# EAGLE board SolderingStation (EAGLE 6.1)
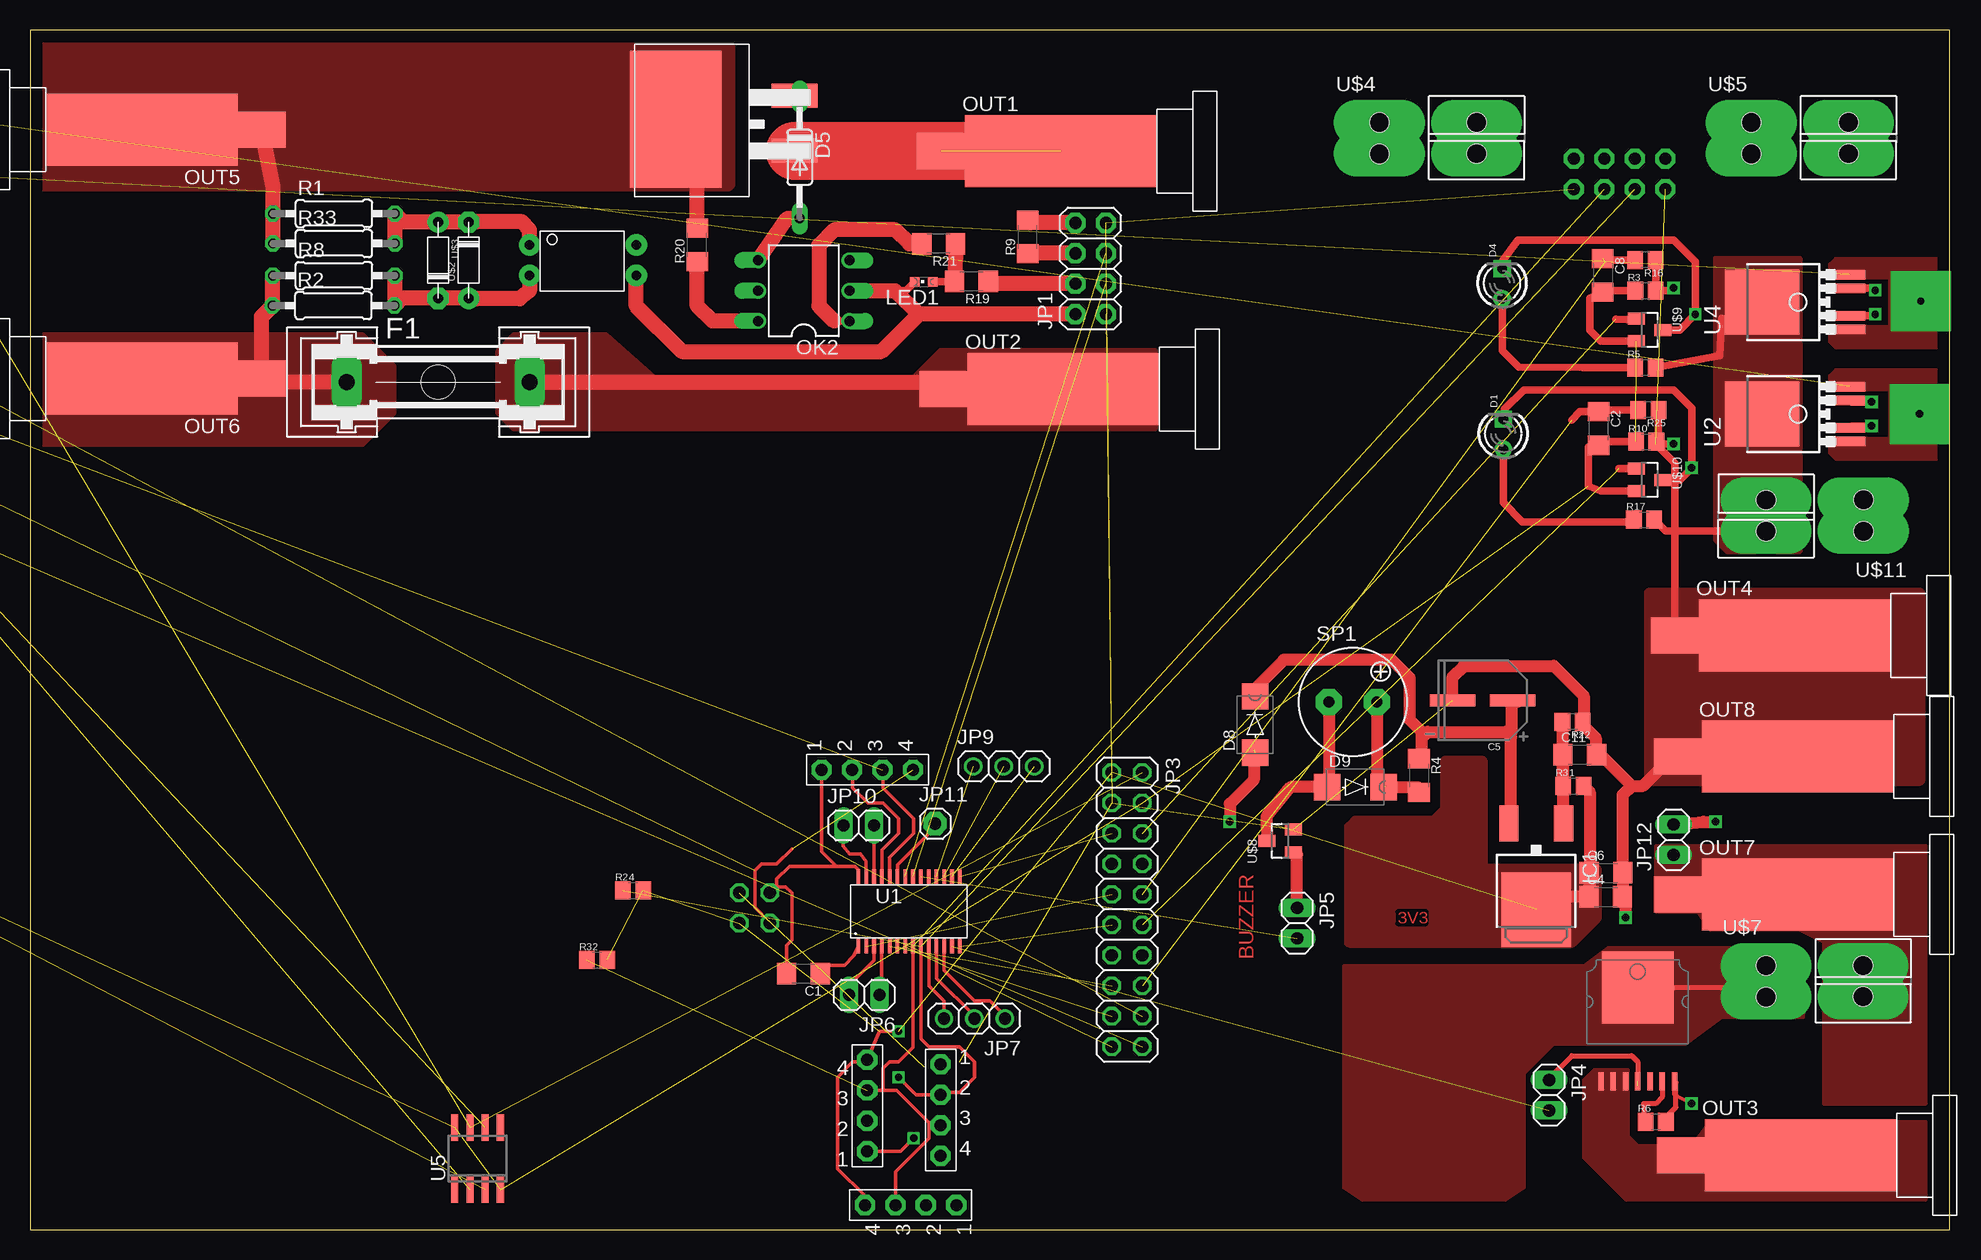
[diagram p0: board, top side]
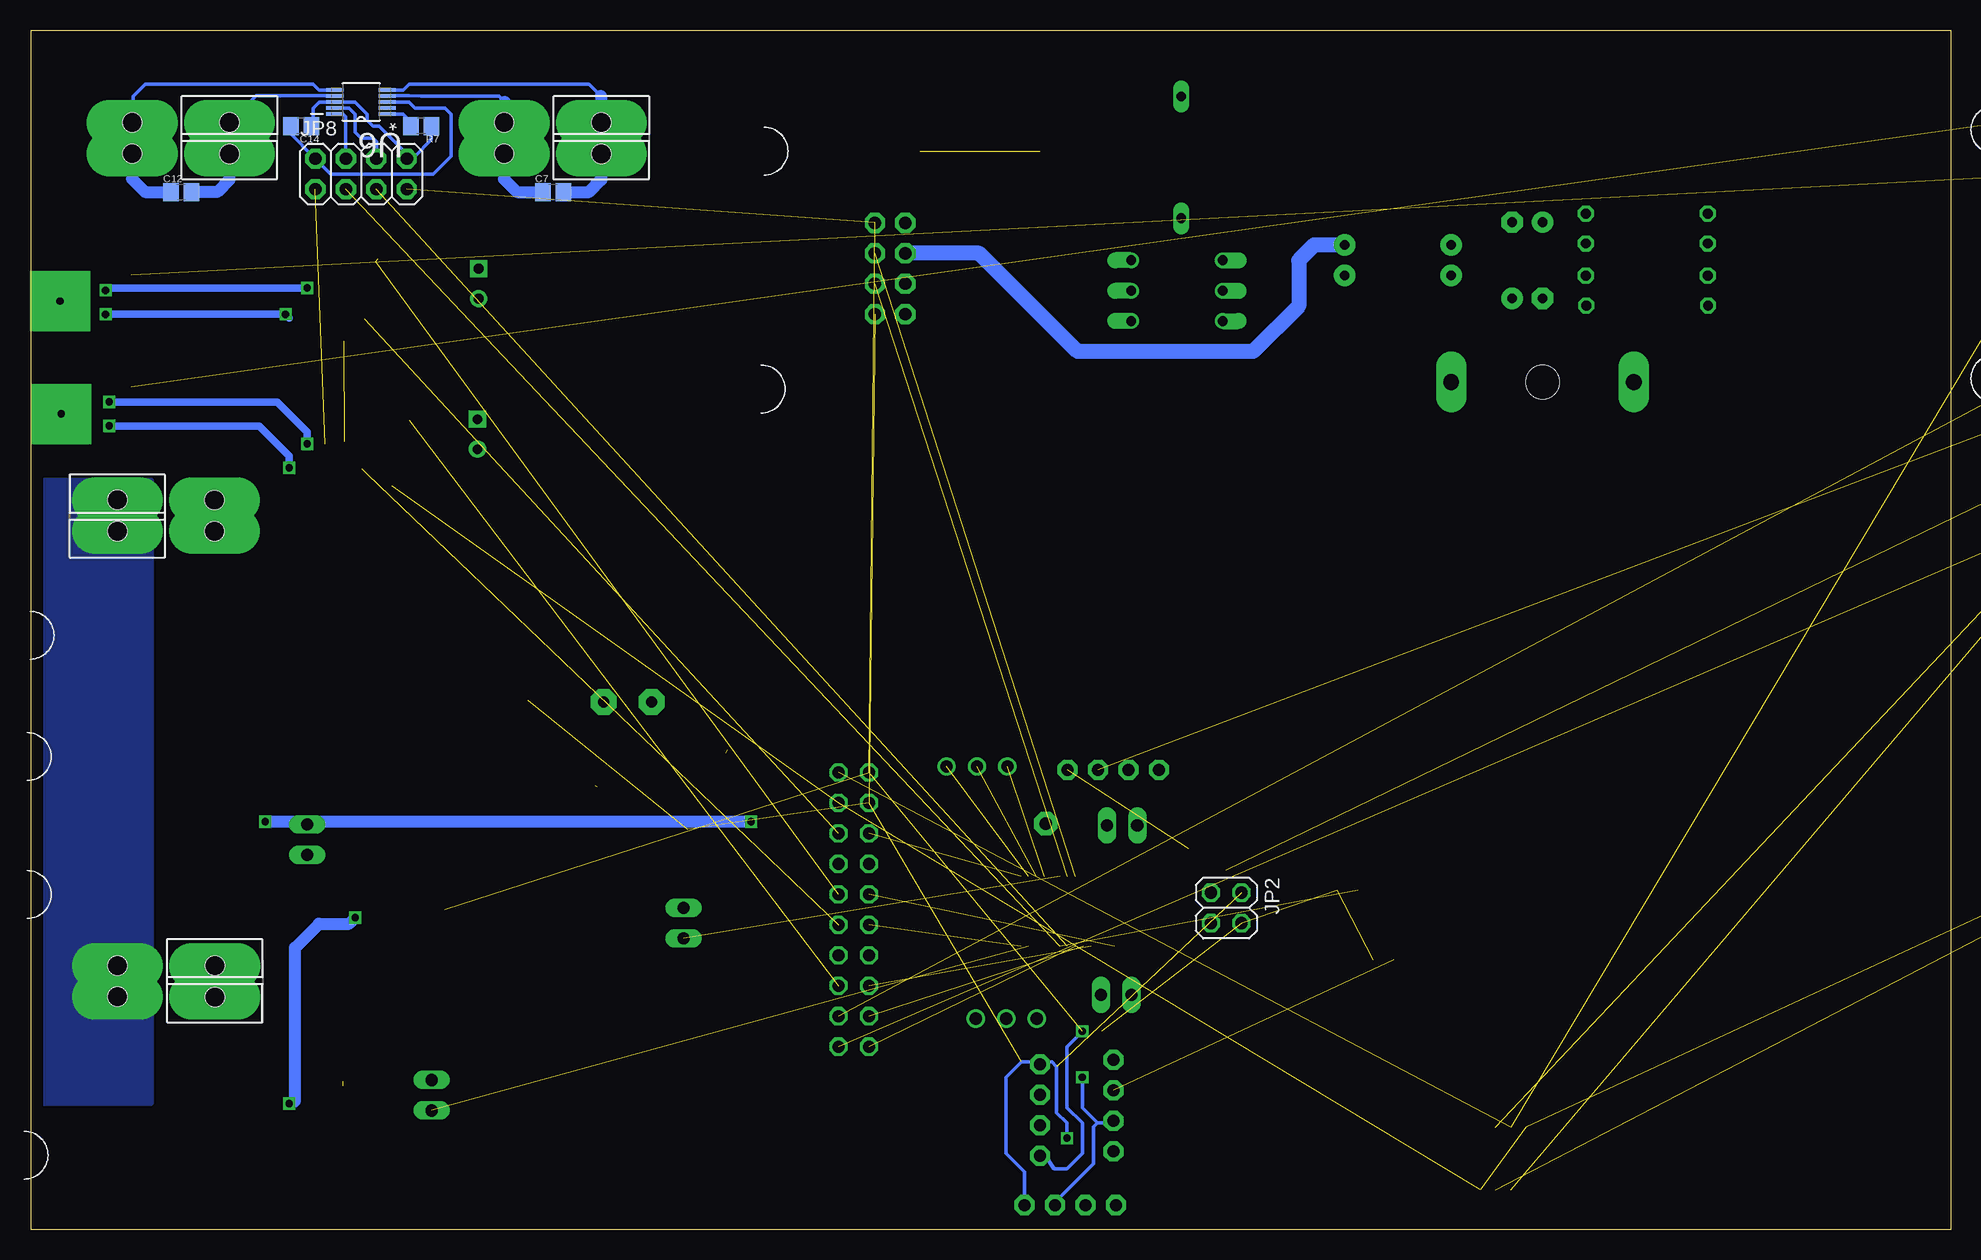
[diagram p1: board, bottom side, seen from below]

Size 160 x 100 mm. Coordinates in mm from the lower left corner, seen from the top.
Outline: 0,0 160,0 160,100 0,100 0,0
Copper layers (1*16): Top 0.035mm / dielectric 1.5mm / Bottom 0.035mm
Design rules: minimum track width 10mil, minimum drill 24mil, track to track 8mil, track to pad 8mil, pad to pad 8mil, via to via 8mil, smd to smd 8mil, copper to edge 40mil, drill to drill 8mil, minimum pad ring 10mil, minimum via ring 8mil, stop-mask expansion 4mil, vias tented up to drill 0mil, thermal gap 10mil

## Footprints (pad centres in the part's own frame; a part is rotated, then mirrored left to right if it is on the bottom)
1206 = smd 1.6 x 1.8: 1 -1.4,0; 2 1.4,0
0805 = smd 1.3 x 1.5: 1 -0.85,0; 2 0.85,0
C_EL_6.3X5.4 = smd 3.81 x 1: + -2.5,0; - 2.5,0
OCTAPAK = smd 0.45 x 1.5: CS 1.03,-7.14; FR_DIAG 2.05,-7.14; GND 3.07,-7.14; INPUT 0.01,-7.14; OUTPUT1 -2.03,-7.14; OUTPUT2 -3.05,-7.14; OUTPUT3 -1.01,-7.14 | smd 6 x 6: VCC 0,0.69
LED_3MM = drill 0.813 pad 1.422: A -1.3,0 | drill 0.813 pad 1.422 square: K 1.2,0
SOT23 = smd 1 x 1.4: 1 -0.95,-1.1; 2 0.95,-1.1; 3 0,1.1
DO35-10 = drill 0.813 long: A 5.08,0; C -5.08,0
S1D = smd 2.2 x 2.2: A -2.35,0; C 2.35,0
GSH15 = drill 1.321 pad 2.54 long: 1 -7.62,0; 2 7.62,0 | hole 2.794: 0,0
DPACK = smd 1.6 x 3: 1 -2.28,-4.8; 3 2.28,-4.8 | smd 5.8 x 6.2: 4 0,2.38
JP4 = drill 1 pad 1.676 octagon: 1 0,-3.81; 2 0,-1.27; 3 0,1.27; 4 0,3.81
2X04 = drill 1.016 pad 1.676 octagon: 1 -3.81,-1.27; 2 -3.81,1.27; 3 -1.27,-1.27; 4 -1.27,1.27; 5 1.27,-1.27; 6 1.27,1.27; 7 3.81,-1.27; 8 3.81,1.27
2X02 = drill 1.016 octagon: 1 -1.27,-1.27; 2 -1.27,1.27; 3 1.27,-1.27; 4 1.27,1.27
2X10 = drill 1.016 octagon: 1 -11.43,-1.27; 2 -11.43,1.27; 3 -8.89,-1.27; 4 -8.89,1.27; 5 -6.35,-1.27; 6 -6.35,1.27; 7 -3.81,-1.27; 8 -3.81,1.27; 9 -1.27,-1.27; 10 -1.27,1.27; 11 1.27,-1.27; 12 1.27,1.27; 13 3.81,-1.27; 14 3.81,1.27; 15 6.35,-1.27; 16 6.35,1.27; 17 8.89,-1.27; 18 8.89,1.27; 19 11.43,-1.27; 20 11.43,1.27
1X02 = drill 1.016 long: 1 -1.27,0; 2 1.27,0
1X03 = drill 1.016: 1 -2.54,0; 2 0,0; 3 2.54,0
1X01 = drill 1.016 pad 1.93 octagon: 1 0,0
CHIPLED_0603 = smd 0.8 x 0.8: A 0,-0.75; C 0,0.75
DIL06 = drill 0.813 offset: 1 -2.54,-3.81; 2 0,-3.81; 3 2.54,-3.81; 4 2.54,3.81; 5 0,3.81; 6 -2.54,3.81
BANANA = smd 16 x 6: P$1 0.84,-0.08 | smd 4 x 3: P$2 -9.16,-0.08
RTH025W = drill 0.813 octagon: 1 -5.08,0; 2 5.08,0
KSTG951AP = drill 0.914 pad 2.159 octagon: + 2,0; - -2,0
PW28 = smd 0.3 x 1.2: 1 -4.229,-2.908; 2 -3.579,-2.908; 3 -2.929,-2.908; 4 -2.279,-2.908; 5 -1.629,-2.908; 6 -0.979,-2.908; 7 -0.329,-2.908; 8 0.321,-2.908; 9 0.971,-2.908; 10 1.621,-2.908; 11 2.271,-2.908; 12 2.921,-2.908; 13 3.571,-2.908; 14 4.221,-2.908; 15 4.221,2.892; 16 3.571,2.892; 17 2.921,2.892; 18 2.271,2.892; 19 1.621,2.892; 20 0.971,2.892; 21 0.321,2.892; 22 -0.329,2.892; 23 -0.979,2.892; 24 -1.629,2.892; 25 -2.279,2.892; 26 -2.929,2.892; 27 -3.579,2.892; 28 -4.229,2.892
TO252-51 = smd 0.8 x 2.6: 1 -2.28,-4.8; 2 -1.14,-4.8; 4 1.14,-4.8; 5 2.28,-4.8 | smd 5.4 x 6.2: TAB 0,2.5
SO08 = smd 0.6 x 2.2: 1 -1.905,-2.6; 2 -0.635,-2.6; 3 0.635,-2.6; 4 1.905,-2.6; 5 1.905,2.6; 6 0.635,2.6; 7 -0.635,2.6; 8 -1.905,2.6
SOP50P490X110-10N = smd 1.422 x 0.279: 1 -2.184,0.991; 2 -2.184,0.508; 3 -2.184,0; 4 -2.184,-0.508; 5 -2.184,-0.991; 6 2.184,-0.991; 7 2.184,-0.508; 8 2.184,0; 9 2.184,0.508; 10 2.184,0.991
DIP_4PIN = drill 0.8 pad 1.778: P$1 1.27,5.08; P$2 -1.27,5.08; P$3 -1.27,-3.81; P$4 1.27,-3.81
ZENER = drill 0.813 pad 1.778: A -3.175,0 | drill 0.813 pad 1.778 octagon: K 3.175,0
SOCLU_THERMOCOUPLE = drill 1.6 pad 3.81 long: 1A -4.019,1.281; 1B 4.081,1.281; 2A -4.019,-1.319; 2B 4.081,-1.321 | hole 1.6: -4.02,1.28; -4.02,-1.33; 4.08,-1.31; 4.08,1.28
TO-263 = smd 2 x 3.81: G 4.6,0; T1 0,0 | smd 11.43 x 7.62: T2 2.635,9.905

## Placement (x,y rotation side)
C1  10uF  [1206]  64.47,21.32 180 top
C2  10uF  [1206]  130.74,66.78 270 top
C3  1nF  [0805]  -72.39,83.82 0 top  (outside the outline)
C4  100nF  [1206]  131.34,27.74 0 top
C5  22uF  [C_EL_6.3X5.4]  121.08,44.12 180 top
C6  10uF  [1206]  131.36,29.74 0 top
C7  1nF  [0805]  116.5,86.5 0 bottom
C8  10uF  [1206]  131.09,79.54 270 top
C9  1nF  [0805]  -76.2,83.82 0 top  (outside the outline)
C10  100nF  [0805]  -80.01,83.82 0 top  (outside the outline)
C11  100nF  [1206]  129.18,39.59 0 top
C12  1nF  [0805]  147.5,86.5 0 bottom
C13  100nF  [0805]  -83.82,83.82 0 top  (outside the outline)
C14  10uF  [0805]  137.5,92 180 bottom
CLH1  VN7004  [OCTAPAK]  134,19.5 0 top
D1  [LED_3MM]  122.81,66.35 90 top
D2  [SOT23]  -80.26,63.26 180 top  (outside the outline)
D3  [SOT23]  -75.82,63.24 0 top  (outside the outline)
D4  [LED_3MM]  122.71,78.9 90 top
D5  [DO35-10]  64.15,89.38 270 top
D6  [SOT23]  -71.1,63.26 180 top  (outside the outline)
D7  [SOT23]  -66.98,63.24 0 top  (outside the outline)
D8  S1D  [S1D]  102.11,42.09 90 top
D9  S1D  [S1D]  110.47,36.89 0 top
F1  2.5A  [GSH15]  34.02,70.65 0 top
IC1  LM317  [DPACK]  125.55,29.05 180 top
J1  [JP4]  75.91,9.96 180 top
J2  [JP4]  69.79,10.32 0 top
J3  [JP4]  73.4,2.04 90 top
J4  [JP4]  69.8,38.32 270 top
JP1  [2X04]  88.41,80.11 90 top
JP2  [2X02]  60.39,26.81 270 bottom
JP3  [2X10]  91.44,26.67 270 top
JP4  [1X02]  126.62,11.19 270 top
JP5  [1X02]  105.62,25.54 270 top
JP6  [1X02]  69.55,19.56 180 top
JP7  [1X03]  78.72,17.59 180 top
JP8  [2X04]  132.5,88 0 bottom
JP9  [1X03]  81.17,38.61 0 top
JP10  [1X02]  69.07,33.69 0 top
JP11  [1X01]  75.44,33.83 0 top
JP12  [1X02]  137,32.5 90 top
LED1  [CHIPLED_0603]  74.5,79 90 top
OK2  IL410  [DIL06]  64.5,78.27 90 top
OUT1  BANANA  [BANANA]  85.09,89.99 0 top
OUT2  BANANA  [BANANA]  85.32,70.15 0 top
OUT3  BANANA  [BANANA]  146.76,6.28 0 top
OUT4  BANANA  [BANANA]  146.26,49.62 0 top
OUT5  BANANA  [BANANA]  10.15,91.61 180 top
OUT6  BANANA  [BANANA]  10.15,70.86 180 top
OUT7  BANANA  [BANANA]  146.5,28 0 top
OUT8  BANANA  [BANANA]  146.5,39.5 0 top
R1  [RTH025W]  25.33,84.69 0 top
R2  [RTH025W]  25.3,77.03 0 top
R3  10K  [0805]  134.66,78.27 0 top
R4  287R  [1206]  115.77,37.85 270 top
R5  4K7  [0805]  134.64,71.87 0 top
R6  4K7  [0805]  135.5,9 0 top
R7  4K7  [0805]  127.5,92 180 bottom
R8  [RTH025W]  25.33,79.52 0 top
R9  4K7  [1206]  83.17,82.75 90 top
R10  10K  [0805]  134.71,65.67 0 top
R11  240K  [0805]  -38.1,90.17 0 top  (outside the outline)
R12  470R  [0805]  -41.91,90.17 0 top  (outside the outline)
R13  1K  [0805]  -45.72,90.17 0 top  (outside the outline)
R14  240K  [0805]  -49.53,90.17 0 top  (outside the outline)
R15  4K7  [0805]  -53.84,85.17 0 top  (outside the outline)
R16  47K  [0805]  134.65,80.83 180 top
R17  4K7  [0805]  134.54,59.17 0 top
R18  4K7  [0805]  -64.77,90.17 0 top  (outside the outline)
R19  295  [1206]  78.47,79.03 180 top
R20  1K  [1206]  55.61,82.08 90 top
R21  124  [1206]  75.74,82.18 180 top
R22  390R  [0805]  128.58,42.33 180 top
R24  4K7  [0805]  50.26,28.28 0 top
R25  47K  [0805]  134.89,68.33 180 top
R26  240K  [0805]  -76.2,90.17 0 top  (outside the outline)
R27  470R  [0805]  -80.01,90.17 0 top  (outside the outline)
R28  1K  [0805]  -83.82,90.17 0 top  (outside the outline)
R29  240K  [0805]  -15.24,93.98 0 top  (outside the outline)
R30  4K7  [0805]  -19.05,93.98 0 top  (outside the outline)
R31  240R  [0805]  128.64,36.98 0 top
R32  4K7  [0805]  47.26,22.47 0 top
R33  [RTH025W]  25.33,82.2 0 top
SP1  KSTG951AP  [KSTG951AP]  110.28,43.98 0 top
U1  MSP340G2443  [PW28]  73.28,26.53 0 top
U2  UPD166010  [TO252-51]  146.88,67.98 90 top
U3  MCP6V08  [SO08]  -59.3,62.91 0 top  (outside the outline)
U4  UPD166010  [TO252-51]  146.88,77.32 90 top
U5  MCP6V08  [SO08]  37.31,5.91 0 top
U6  ADS1115IDGST  [SOP50P490X110-10N]  132.5,94 180 bottom
U$1  FOD814SD  [DIP_4PIN]  46.72,80.81 90 top
U$2  5V  [ZENER]  36.56,80.81 90 top
U$3  5V  [ZENER]  34.02,80.81 270 top
U$4  Siguranta  [SOCLU_THERMOCOUPLE]  116.5,91 0 top
U$5  Siguranta  [SOCLU_THERMOCOUPLE]  147.5,91 0 top
U$6  Q8025NH6RP  [TO-263]  63.74,89.92 90 top
U$7  Siguranta  [SOCLU_THERMOCOUPLE]  148.72,20.71 0 top
U$8  NUD3160  [SOT23]  104.2,32.4 90 top
U$9  NUD3160  [SOT23]  135,75 270 top
U$10  NUD3160  [SOT23]  135,62.5 270 top
U$11  Siguranta  [SOCLU_THERMOCOUPLE]  148.8,59.5 180 top

## Library data of the parts
C1-C3 C7-C10 C12 C13 R3-R7 R10-R18 R22 R24-R32 = adi_v1.2
C4 C6 C11 C14 = ATE
C5 D1 D4 D9 J1-J4 U$8-U$10 = adi_v1.4
CLH1 U$1 U$4-U$7 U$11 = Serghei IR station
D2 D3 D6-D8 U1-U5 = adi_v1.3
D5 = diode
F1 = fuse; MPN: 64900001039; OC_FARNELL: 1271673; OC_NEWARK: 02P0318
IC1 = v-reg
JP1 JP7-JP9 = adafruit1
JP2 JP4-JP6 JP10 JP12 = pinhead
JP3 OUT1-OUT8 R9 R19-R21 = H_bridge_library
JP11 = adafruit
LED1 = led
OK2 = optocoupler; MF: VISHAY/TELEFUNKEN; MPN: IL410; OC_FARNELL: 1045434; OC_NEWARK: 58K1715
R1 R2 R8 R33 = dp_devices
SP1 = adi_v1.4; OC_FARNELL: http://ro.farnell.com/kingstate/kstg951ap/buzzer-magnetic-pin-85db-5v/dp/2215078?Ntt=KSTG951AP; OC_NEWARK: unknown
U6 = Texas Instruments_By_element14_Batch_1; MPN: ADS1115IDGST; OC_FARNELL: 1762981; OC_NEWARK: 25R1241; PACKAGE: MSOP-10; SUPPLIER: Texas Instruments
U$2 U$3 = adi_v1.6

## Nets
24V_DRIVER_UC: JP4.2 U1.13
220V_DRIVER_UC: JP1.3 U1.21
+3V3: C4.1 C6.1 IC1.4 J1.4 J2.4 J3.4 JP1.7 JP2.4 JP3.1 JP8.7 R24.2 R31.2 R32.2
+3V3_220V: JP1.8 R9.2
+3V3_CONTROLLER: C1.1 U1.1
+3V3_ST_LIPIT: C10.1 C13.1 JP3.2 R14.2 R29.2 U3.7 U5.7
+3V3_UC: J4.4 JP2.3 R18.2
+12V: C5.+ D8.C IC1.3 R4.1
+15V: JP12.1 OUT7.P$1 OUT7.P$2 U$7.1B U$7.2B U$11.1A U$11.2A
CRT_SENSE1: C8.1 JP3.10 R16.2
CRT_SENSE1_UC: JP3.9 U1.2
CRT_SENSE2: C2.1 JP3.16 R25.2
CRT_SENSE2_UC: JP3.15 U1.5
ENCODER1_1: JP9.3 U1.16
ENCODER1_2: JP9.2 U1.17
ENCODER1_3: JP9.1 U1.18
ENCODER2_1: JP7.3 U1.10
ENCODER2_2: JP7.2 U1.11
ENCODER2_3: JP7.1 U1.12
ENCODER3_1: JP10.1 U1.27
ENCODER3_2: JP10.2 U1.26
ENCODER3_3: JP11.1 U1.23
FET_PWM1: JP3.6 U$9.1
FET_PWM1_UC: JP3.5 U1.15
FET_PWM2: JP3.12 U$10.1
FET_PWM2_UC: JP3.11 U1.14
GND: C4.2 C5.- C6.2 C11.2 CLH1.GND J1.1 J2.1 J3.1 JP1.1 JP2.2 JP3.3 JP8.1 OUT4.P$1 OUT4.P$2 OUT8.P$1 OUT8.P$2 R6.2 R22.1 U$8.2
GND_220V: JP1.2 LED1.C OK2.2 U$1.P$3
GND_ST_LIPIT: C2.2 C3.2 C8.2 C9.2 C10.2 C13.2 D2.3 D3.1 D6.3 D7.1 JP3.4 R3.1 R10.1 R13.1 R28.1 U3.4 U3.8 U5.4 U5.8 U$9.2 U$10.2
GND_UC: C1.2 J4.1 JP2.1 U1.28
N$2: D1.K U2.2 U$10.3
N$3: D4.A R5.1
N$4: D1.A R17.1
N$5: D9.A SP1.- U$8.3
N$7: D4.K U4.2 U$9.3
N$8: R10.2 R25.1 U2.4
N$9: R26.1 R27.2 U3.6
N$10: D6.1 D7.3 R30.1 U3.3
N$11: R26.2 R28.2 U3.2
N$12: OK2.6 R20.1
N$13: D5.A OK2.4
N$14: OK2.1 R21.2
N$15: JP1.4 R19.1
N$16: CLH1.VCC U$7.1A U$7.2A
N$17: LED1.A R19.2 R21.1
N$18: D5.C U$6.G
N$19: D9.C R4.2 SP1.+
N$20: CLH1.FR_DIAG R6.1
N$21: F1.1 OUT6.P$1 OUT6.P$2 R2.1 R8.1
N$26: CLH1.INPUT JP4.1
N$27: R3.2 R16.1 U4.4
N$29: R11.1 R12.2 U5.6
N$30: R1.2 R33.2 U$1.P$1 U$2.K U$3.A
N$31: D2.1 D3.3 R15.1 U5.3
N$32: R2.2 R8.2 U$1.P$2 U$2.A U$3.K
N$34: R11.2 R13.2 U5.2
N$35: CLH1.OUTPUT1 CLH1.OUTPUT2 CLH1.OUTPUT3 OUT3.P$1 OUT3.P$2
N$36: JP1.6 R9.1 U$1.P$4
N$37: C14.2 JP8.2 U6.3
N$38: R7.2 U6.1
N$39: C14.1 JP8.8 R7.1 U6.8
N$40: C7.1 U6.4 U$4.1B U$4.2B
N$41: C7.2 U6.5 U$4.1A U$4.2A
N$42: C11.1 IC1.1 R22.2 R31.1
N$43: C12.1 U6.6 U$5.1B U$5.2B
N$44: C12.2 U6.7 U$5.1A U$5.2A
N$45: JP8.4 U6.10
N$46: JP8.6 U6.9
N$50: R5.2 R17.2 U2.TAB U4.TAB U$11.1B U$11.2B
N$51: D8.A JP12.2
OUTPUT_DIAGNOSE1: JP3.8
OUTPUT_DIAGNOSE1_UC: JP3.7
OUTPUT_DIAGNOSE2: JP3.14
OUTPUT_DIAGNOSE2_UC: JP3.13
RST: J4.3 R18.1 U1.24
RX: JP6.2 U1.3
SCL: J1.2 J2.2 J3.2 JP8.3 R24.1 U1.9
SDA: J1.3 J2.3 J3.3 JP8.5 R32.1 U1.8
SEGMENT_D: U1.19
SPEAKER: JP5.1 U$8.1
SPEAKER_UC: JP5.2 U1.20
TEST: J4.2 U1.25
TIP+_1: C9.1 R14.1 R15.2 U4.1 U4.5
TIP+_2: C3.1 R29.1 R30.2 U2.1 U2.5
TIP_TEMP1: JP3.18 R12.1
TIP_TEMP1_UC: JP3.17 U1.6
TIP_TEMP2: JP3.20 R27.1
TIP_TEMP2_UC: JP3.19 U1.7
TX: JP6.1 U1.4
ZERO_CROSS_UC: JP1.5 U1.22
~+OUT: F1.2 OUT2.P$1 OUT2.P$2
~-OUT: OUT1.P$1 OUT1.P$2 U$6.T1
~IN1: OUT5.P$1 OUT5.P$2 R1.1 R20.2 R33.1 U$6.T2

## Tracks (layer width: path | path; a pad name or v marks a point on that pad's centre or on a via)
24V_DRIVER_UC  (1 unrouted)
220V_DRIVER_UC  (1 unrouted)
+3V3  (via drill 0.6)  (7 unrouted)
  Top 0.305: v72.39,16.51 70.8,16.51 J2.4 69.63,13.97 68.58,13.97 67.31,12.7 67.31,5.08 69.59,2.8 J3.4
  Top 1.016: R31.2 129.52,36.98 130,36.5 130,28 129.94,27.94 C4.1 | C6.1 129.96,27.76 C4.1 | C4.1 126.62,27.74 IC1.4
  Bottom 0.305: v72.39,16.51 73.66,15.24 73.66,10.16 72.39,8.89 72.39,6.35 73.66,5.08 74.74,5.08 75.46,6.13 J1.4
  pour Top (no thermals): 130.5,30 121,30 121,39 118,39 118,35 117,34 110.5,34 110,33.5 110,24 128.5,24 130.5,26
+3V3_220V
  Top 0.61: 83.39,83.92 R9.2
  Top 1.27: JP1.8 83.39,83.92
+3V3_CONTROLLER
  Top 0.305: U1.1 68.64,22.79 67.88,22.04 66.58,22.04 C1.1
+3V3_ST_LIPIT  (6 unrouted)
+3V3_UC  (2 unrouted)
  Top 0.305: JP2.3 61.66,25.62 60.42,26.86 60.42,29.94 60.96,30.48 62.23,30.48 63.5,31.75
+12V
  Top 1.016: IC1.3 123.44,34.02 123.44,41.06 123,41.5 | R4.1 116,38.93 116,41 | 116,41 116.5,41.5 123,41.5 | 123,41.5 123.5,41.5 123.5,44 | 124,44 123.5,44 | C5.+ 123.5,44.04 123.5,44 | 116,41 116,41.5 115,42.5 115,46 113.5,47.5 104.5,47.5 102,45 102,44.5 102.06,44.44 D8.C
+15V
  pour Top (no thermals): 140,25 147.5,25 149.5,24 149.5,10.5 158,10.5 158,32 135.5,32 135.5,26.5 139,26.5
  pour Bottom (no thermals): 150,62.5 150,10.5 160,10.5 160,62.5
CRT_SENSE1  (2 unrouted)
  Top 0.61: R16.2 131.43,80.83 131.3,80.7
CRT_SENSE1_UC  (1 unrouted)
CRT_SENSE2  (1 unrouted)
  Top 0.61: R25.2 131.59,68.33 C2.1 129.18,68.18 128.5,67.5
CRT_SENSE2_UC  (1 unrouted)
ENCODER1_1  (1 unrouted)
ENCODER1_2  (1 unrouted)
ENCODER1_3  (1 unrouted)
ENCODER2_1
  Top 0.305: JP7.3 76.18,19.07 | 76.18,19.07 76.2,19.05 | 76.18,19.07 74.93,20.32 74.93,23.6 U1.10
ENCODER2_2
  Top 0.305: JP7.2 78.72,17.8 75.56,20.95 75.56,23.61 U1.11
ENCODER2_3
  Top 0.305: JP7.1 81.26,17.8 80.01,19.05 78.74,19.05 76.2,21.59 U1.12
ENCODER3_1
  Top 0.305: U1.27 69.7,30.71 69.24,31.31 68.29,31.3 67.79,31.97 67.77,31.99 JP10.1
ENCODER3_2
  Top 0.305: U1.26 70.35,32.25 70.36,32.51 70.36,33.16 JP10.2
ENCODER3_3
  Top 0.305: U1.23 72.3,30.39 73.66,31.75 75.74,33.81 JP11.1
FET_PWM1  (1 unrouted)
  Top 0.61: U$9.1 133.15,75.85 132.2,75.9
FET_PWM1_UC  (1 unrouted)
FET_PWM2  (2 unrouted)
  Top 0.61: U$10.1 132.45,63.45
FET_PWM2_UC  (1 unrouted)
GND  (via drill 0.6)  (6 unrouted)
  Top 0.305: J2.1 72.55,6.51 v73.66,7.62 | CLH1.GND 137.04,11.26 v138.5,10.5 | 133,27.48 C4.2
  Top 0.406: R6.2 136.35,9.35 137.2,10.2 137.2,12.23 CLH1.GND
  Top 0.61: OUT4.P$2 137.1,63.9 135.5,65.5
  Top 1.016: C5.- 118.58,46.08 119.5,47 127,47 129.5,44.5 129.5,42.4 R22.1 129.43,42.07 130.5,41 130.5,39.67 C11.2 130.91,39.59 133.5,37 | 133.5,37 132.76,36.26 C6.2 132.76,27.76 C4.2 | 133.5,37 134.46,37 137.34,39.88 OUT8.P$2 OUT8.P$1 | OUT4.P$2 OUT4.P$1 | v133,26 133,27.48
  Bottom 0.305: v73.66,7.62 73.66,8.89 74.52,9.75 74.52,13.56 74.93,13.97 75.71,13.97 J1.1 76.11,13.97 77.47,13.97 78.74,12.7 78.74,6.35 77.21,4.82 J3.1
  Bottom 1.016: v138.5,10.5 138,10.7 138,23.5 136,25.5 133.5,25.5 v133,26
  pour Top (no thermals): 135,53 135,37.5 157.5,37.5 157.5,53
GND_220V
  Top 0.61: 72.12,78.27 73.02,78.27 LED1.C
  Top 1.27: JP1.2 74.09,76.3 | 74.09,76.3 70.98,73.19 54.34,73.19 50.53,77 U$1.P$3 | OK2.2 72.12,78.27 74.09,76.3
GND_ST_LIPIT  (16 unrouted)
  Top 0.61: R3.1 131.12,78.27 C8.2 130,77.65 130,75 130.95,74.05 U$9.2 | U$10.2 130.95,61.55 129.9,62 129.9,65.24 C2.2 131.23,65.67 R10.1
GND_UC
  Top 0.305: U1.28 69.05,29.97 68.77,30.29 68.58,30.29 67.22,30.29 | 67.22,30.29 63.31,30.29 62.23,29.21 62.23,28.65 | 62.23,28.65 JP2.1 | C1.2 63.07,23.7 63.5,24.13 63.5,28.07 62.99,28.57 62.3,28.57 62.23,28.65 | J4.1 65.99,31.51 67.22,30.29
N$2  (via drill 0.6 pad 1.02)
  Top 0.61: D1.K 122.91,68.41 124.5,70 137,70 138.5,68.5 v138.5,63.5 137.5,62.5 U$10.3 136,62.5 | U2.2 151.84,67 v153.5,67
  Bottom 0.61: v153.5,67 141,67 138.5,64.5 v138.5,63.5
N$3
  Top 0.61: R5.1 129.44,71.87 124.1,71.9 122.71,73.29 D4.A
N$4
  Top 0.61: D1.A 122.81,60.59 124.4,59 133.52,59 R17.1
N$5
  Top 1.016: SP1.- 108.28,37.05 D9.A 105.06,36.89 103.06,34.44 U$8.3
N$7  (via drill 0.6 pad 1.02)
  Top 0.61: D4.K 122.71,80.71 124,82.5 137,82.5 138.8,80.7 v138.8,76.3 137.5,75 U$9.3 | U4.2 153.38,76.18 v153.8,76.3
  Bottom 0.61: v153.8,76.3 v138.8,76.3 138.5,76
N$8  (via drill 0.6 pad 1.02)
  Top 0.61: U2.4 151.8,69 v153.5,69 | v137,65.5 135.5,65.5 135.56,65.56 R10.2 135.74,65.85 R25.1
  Bottom 0.61: v153.5,69 139.5,69 137,66.5 v137,65.5
N$9  (2 unrouted)
N$10  (3 unrouted)
N$11  (2 unrouted)
N$12
  Top 1.27: OK2.6 56.88,75.73 55.61,77 R20.1
N$13
  Top 1.27: D5.A 63.07,84.27 OK2.4
N$14
  Top 0.61: 67.04,75.73 OK2.1
  Top 1.27: R21.2 73.3,82.17 72.12,83.35 67.04,83.35 65.77,82.08 65.77,77 67.04,75.73
N$15
  Top 1.27: R19.1 79.84,78.85 80.26,78.84 JP1.4
N$16
  Top 0.406: CLH1.VCC 142.69,20.19 144.5,22 | U$7.1A 144.7,19.7 144.5,19.5
  pour Top (isolate 0.406, no thermals): 109.5,22 129.5,22 131.5,23.5 146.5,23.5 147.8,22.5 147.8,17.7 141,17.7 138,15.5 127,15.5 124.5,13 124.5,3.5 123,2.5 111,2.5 109.5,3.5
N$17
  Top 0.61: LED1.A R19.2 77.1,79.29
  Top 1.27: R21.1 77.1,79.29
N$18
  Top 1.27: U$6.G 64.76,94.52 D5.C
N$19  (1 unrouted)
  Top 1.016: SP1.+ 112.28,37.72 113,37 | D9.C 115.66,36.89 R4.2
N$20
  Top 0.406: CLH1.FR_DIAG 136.05,11.05 135.5,10.5 134.5,10.5 134.5,9 R6.1
N$21
  Top 0.305: 20.22,79.49 R8.1
  Top 0.61: OUT6.P$1 19.76,70.94 20.05,70.65
  Top 1.27: 20.22,79.49 R2.1 19.31,76.12 OUT6.P$2 19.6,70.65 20.05,70.65 F1.1
  pour Top (no thermals): 1,74.46 1,65.57 27.67,65.57 30.21,68.11 30.21,71.92 27.67,74.46
N$26  (1 unrouted)
  Top 0.406: JP4.1 126.62,12.62 128.5,14.5 133.5,14.5 134,14 134,12
N$27  (via drill 0.6 pad 1.02)
  Top 0.61: U4.4 153.34,78.46 v153.8,78.3 | R16.1 135.5,78.78 R3.2 136.73,78.27 v137,78.5
  Bottom 0.61: v137,78.5 153.6,78.5 v153.8,78.3
N$29  (2 unrouted)
N$30
  Top 0.305: 37.08,84.5 U$2.K
  Top 1.27: R33.2 R1.2 31.12,83.98 U$3.A U$2.K 37.2,84.02 41.04,84.02 41.64,83.35 U$1.P$1
N$31  (3 unrouted)
N$32
  Top 0.305: 30.41,77.06 R2.2
  Top 1.27: R8.2 30.41,77.06 | U$1.P$2 41.64,78.27 40.81,77.6 37.2,77.6 U$2.A U$3.K 30.99,77.64 R2.2
N$34  (2 unrouted)
N$35
  pour Top (isolate 0.305, no thermals): 158,2.5 133,2.5 129.5,6 129.5,12.5 130.4,13.3 133.2,13.3 133.2,7.8 134,7 138.5,7 140,9 158,9
N$36
  Top 0.61: 83.2,81.38 R9.1
  Top 1.27: JP1.6 83.2,81.38
  Bottom 1.27: U$1.P$4 53.07,82.08 54.34,80.81 54.34,77 58.15,73.19 72.79,73.19 80.98,81.38 JP1.6
N$37
  Bottom 0.305: C14.2 138.5,91.46 JP8.2 135.04,88 126.5,88 125,89.5 125,93 125.5,93.5 128,93.5 128.5,94 U6.3
N$38
  Bottom 0.305: R7.2 128.35,92.35 129,93 130.5,93 130.49,93.01 U6.1
N$39
  Bottom 0.305: R7.1 126.65,90.85 128,89.5 128.46,89.5 JP8.8 129,89.58 129,90 131,92 131.5,92 132,92.5 132,93 133,94 U6.8 136,94 136.5,93.5 136.5,92.15 C14.1
N$40
  Bottom 0.305: U6.4 128.49,94.51 127.5,94.5 121,94.5 120.5,94 | 120.5,92.36 U$4.1B
  Bottom 1.016: U$4.1B U$4.2B 120.58,87.58 119.5,86.5 C7.1 | 120.5,94 120.5,92.36
N$41
  Bottom 0.305: U6.5 129.01,94.99 128.5,95.5 113.5,95.5 112.5,94.5 | 112.5,92.3 U$4.1A
  Bottom 1.016: C7.2 113.5,86.5 112.48,87.52 U$4.2A U$4.1A | 112.5,94.5 112.5,92.3
N$42
  Top 1.016: R22.2 127.79,42.27 R31.1 127.78,39.97 C11.1 127.78,33.9 IC1.1
N$43
  Bottom 0.305: U6.6 135.99,94.99 136.5,95.5 150.5,95.5 151.5,94.5 U$5.1B
  Bottom 1.016: U$5.1B U$5.2B 151.58,87.58 150.5,86.5 C12.1
N$44
  Bottom 0.305: U6.7 141.25,94.51 U$5.1A
  Bottom 1.016: U$5.1A U$5.2A 143.48,87.52 144.5,86.5 C12.2
N$45
  Bottom 0.305: 134.5,93 134.51,93.01 U6.10 134,93 133.77,92.77 JP8.4
N$46
  Bottom 0.305: U6.9 133.49,93.49 133,93 133,91.5 132.5,91 131.5,91 131.2,90.7 131.2,89.3 JP8.6
N$50
  Top 0.61: R5.2 140.87,72.87 141,76 | R17.2 136.34,58.22 U$11.1B
  pour Top (no thermals): 147.5,56.5 141.5,56.5 140.5,57.5 140.5,81 147.5,81
N$51  (via drill 0.6)  (1 unrouted)
  Top 1.016: 102,40 102,37.5 100,35.5 v100,34 | JP12.2 139.5,34 v140.5,34
  Bottom 1.016: v100,34 v140.5,34
RST  (1 unrouted)
  Top 0.305: U1.24 71.65,31.01 73.66,33.02 73.66,34.29 71.12,36.83 71.12,38.27 J4.3
RX
  Top 0.305: JP6.2 68.28,20.37 70.36,22.45 U1.3
SCL  (via drill 0.6)  (2 unrouted)
  Top 0.305: v72.39,12.7 73.86,11.23 J1.2 76.11,11.43 77.47,11.43 78.74,12.7 78.74,13.97 77.47,15.24 74.93,15.24 74.25,15.92 U1.9
  Bottom 0.305: v72.39,12.7 72.39,10.16 71.12,8.89 | 71.12,8.89 69.95,8.89 J2.2 | J3.2 74.67,2.26 71.44,5.49 71.44,8.57 71.12,8.89
SDA  (2 unrouted)
  Top 0.305: J2.3 71.22,11.59 | 71.22,11.59 72.23,11.59 74.93,8.89 | 74.93,8.89 75.71,8.89 J1.3 | J3.3 72.13,4.82 74.93,7.62 74.93,8.89 | U1.8 73.6,15.18 72.39,13.97 71.66,13.97 71.12,13.43 71.12,11.69 71.22,11.59
SPEAKER
  Top 1.016: JP5.1 105.61,31.26 U$8.1
SPEAKER_UC  (1 unrouted)
TEST
  Top 0.305: U1.25 71,31.63 72.39,33.02 72.39,34.29 71.12,35.56 69.85,35.56 68.58,36.83 68.58,38.27 J4.2
TIP+_1  (via drill 0.6 pad 5)  (3 unrouted)
  other vias: 157.6,77.4
  pour Top (no thermals): 155,79.3 150,79.3 150,80.5 150.5,81 160.5,81 160.5,73.5 150.5,73.5 150,74 150,75.1 150.2,75.3 155,75.3
TIP+_2  (via drill 0.6 pad 5)  (3 unrouted)
  other vias: 157.5,68
  pour Top (no thermals): 155,70 150,70 150,71.2 150.5,71.7 160.2,71.7 160.2,64.2 150.5,64.2 150,64.7 150,65.8 150.2,66 155,66
TIP_TEMP1  (1 unrouted)
TIP_TEMP1_UC  (1 unrouted)
TIP_TEMP2  (1 unrouted)
TIP_TEMP2_UC  (1 unrouted)
TX
  Top 0.305: JP6.1 70.82,20.02 70.99,20.32 U1.4
ZERO_CROSS_UC  (1 unrouted)
~+OUT
  Top 1.27: F1.2 85.58,70.65 OUT2.P$1
  pour Top (no thermals): 52.31,70.65 47.99,74.46 40.37,74.46 39.1,73.19 39.1,68.11 40.37,66.84 93.71,66.84 93.71,73.19 75.93,73.19 73.39,70.65
~-OUT  (1 unrouted)
  Top 1.27: 87.41,89.92 OUT1.P$1
  Top 4.826: U$6.T1 87.41,89.92
~IN1
  Top 0.61: 55.61,90.78 U$6.T2
  Top 1.27: R1.1 R33.1 20.25,86.94 OUT5.P$2 | R20.2 55.61,90.78
  pour Top (no thermals): 58.15,87.16 1,87.16 1,98.59 58.15,98.59

## Text on the board
Top: 3V3 | BUZZER